# Altium PCB POWR0008.PcbDoc
Units mm, origin at the board's own origin, x right, y up, seen from the top; angles counter-clockwise.
Board outline 50 x 50 mm, 2 copper layers (Top Layer, Bottom Layer); 40 components, 31 nets, 143 pads, 71 vias.
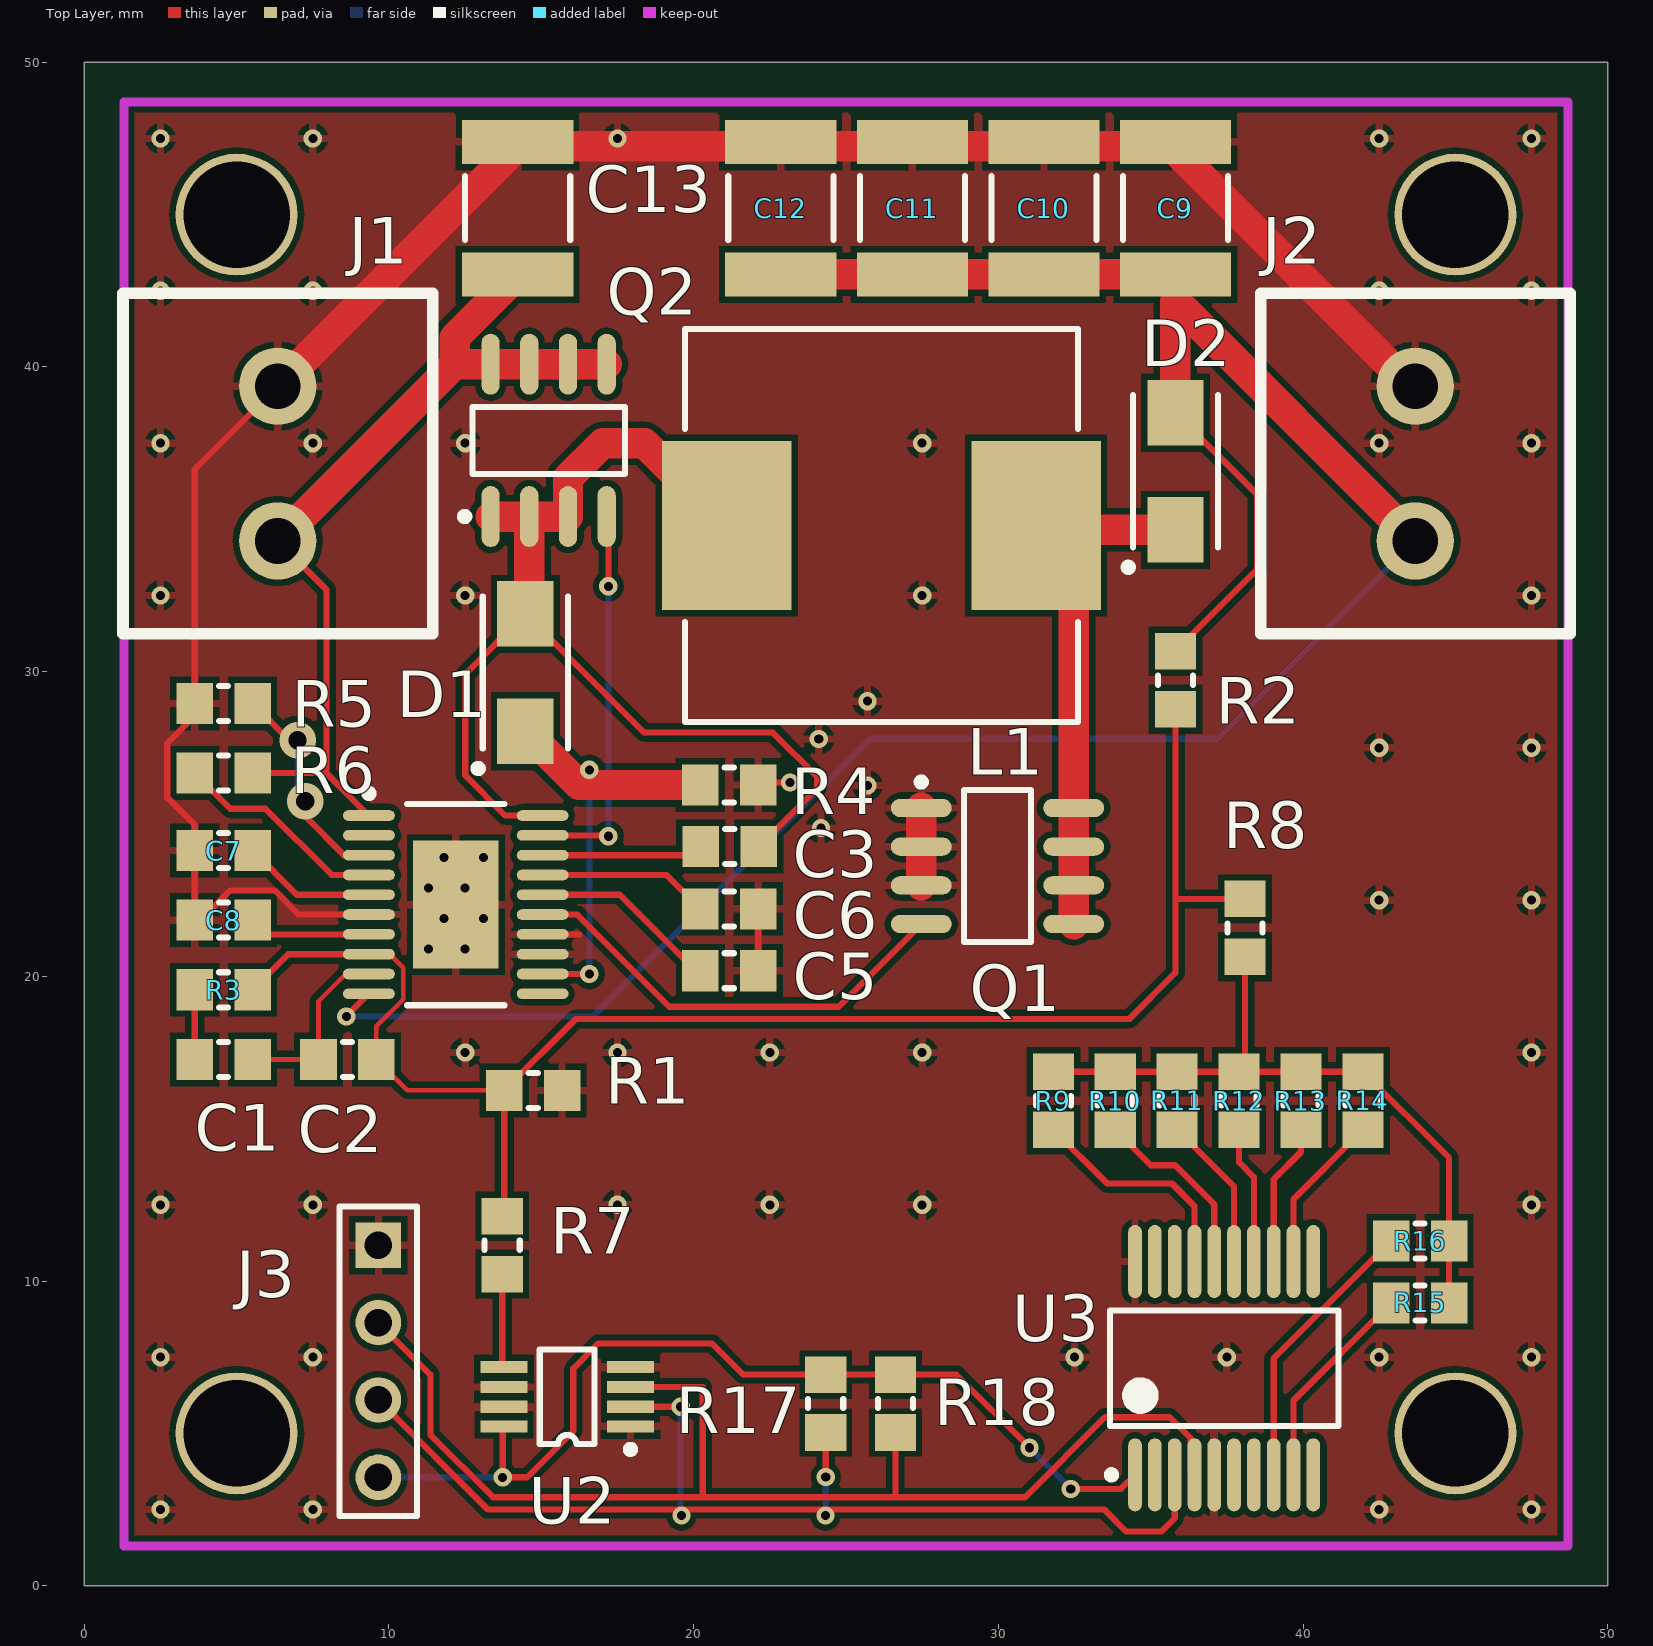
[diagram p0: Top Layer view]
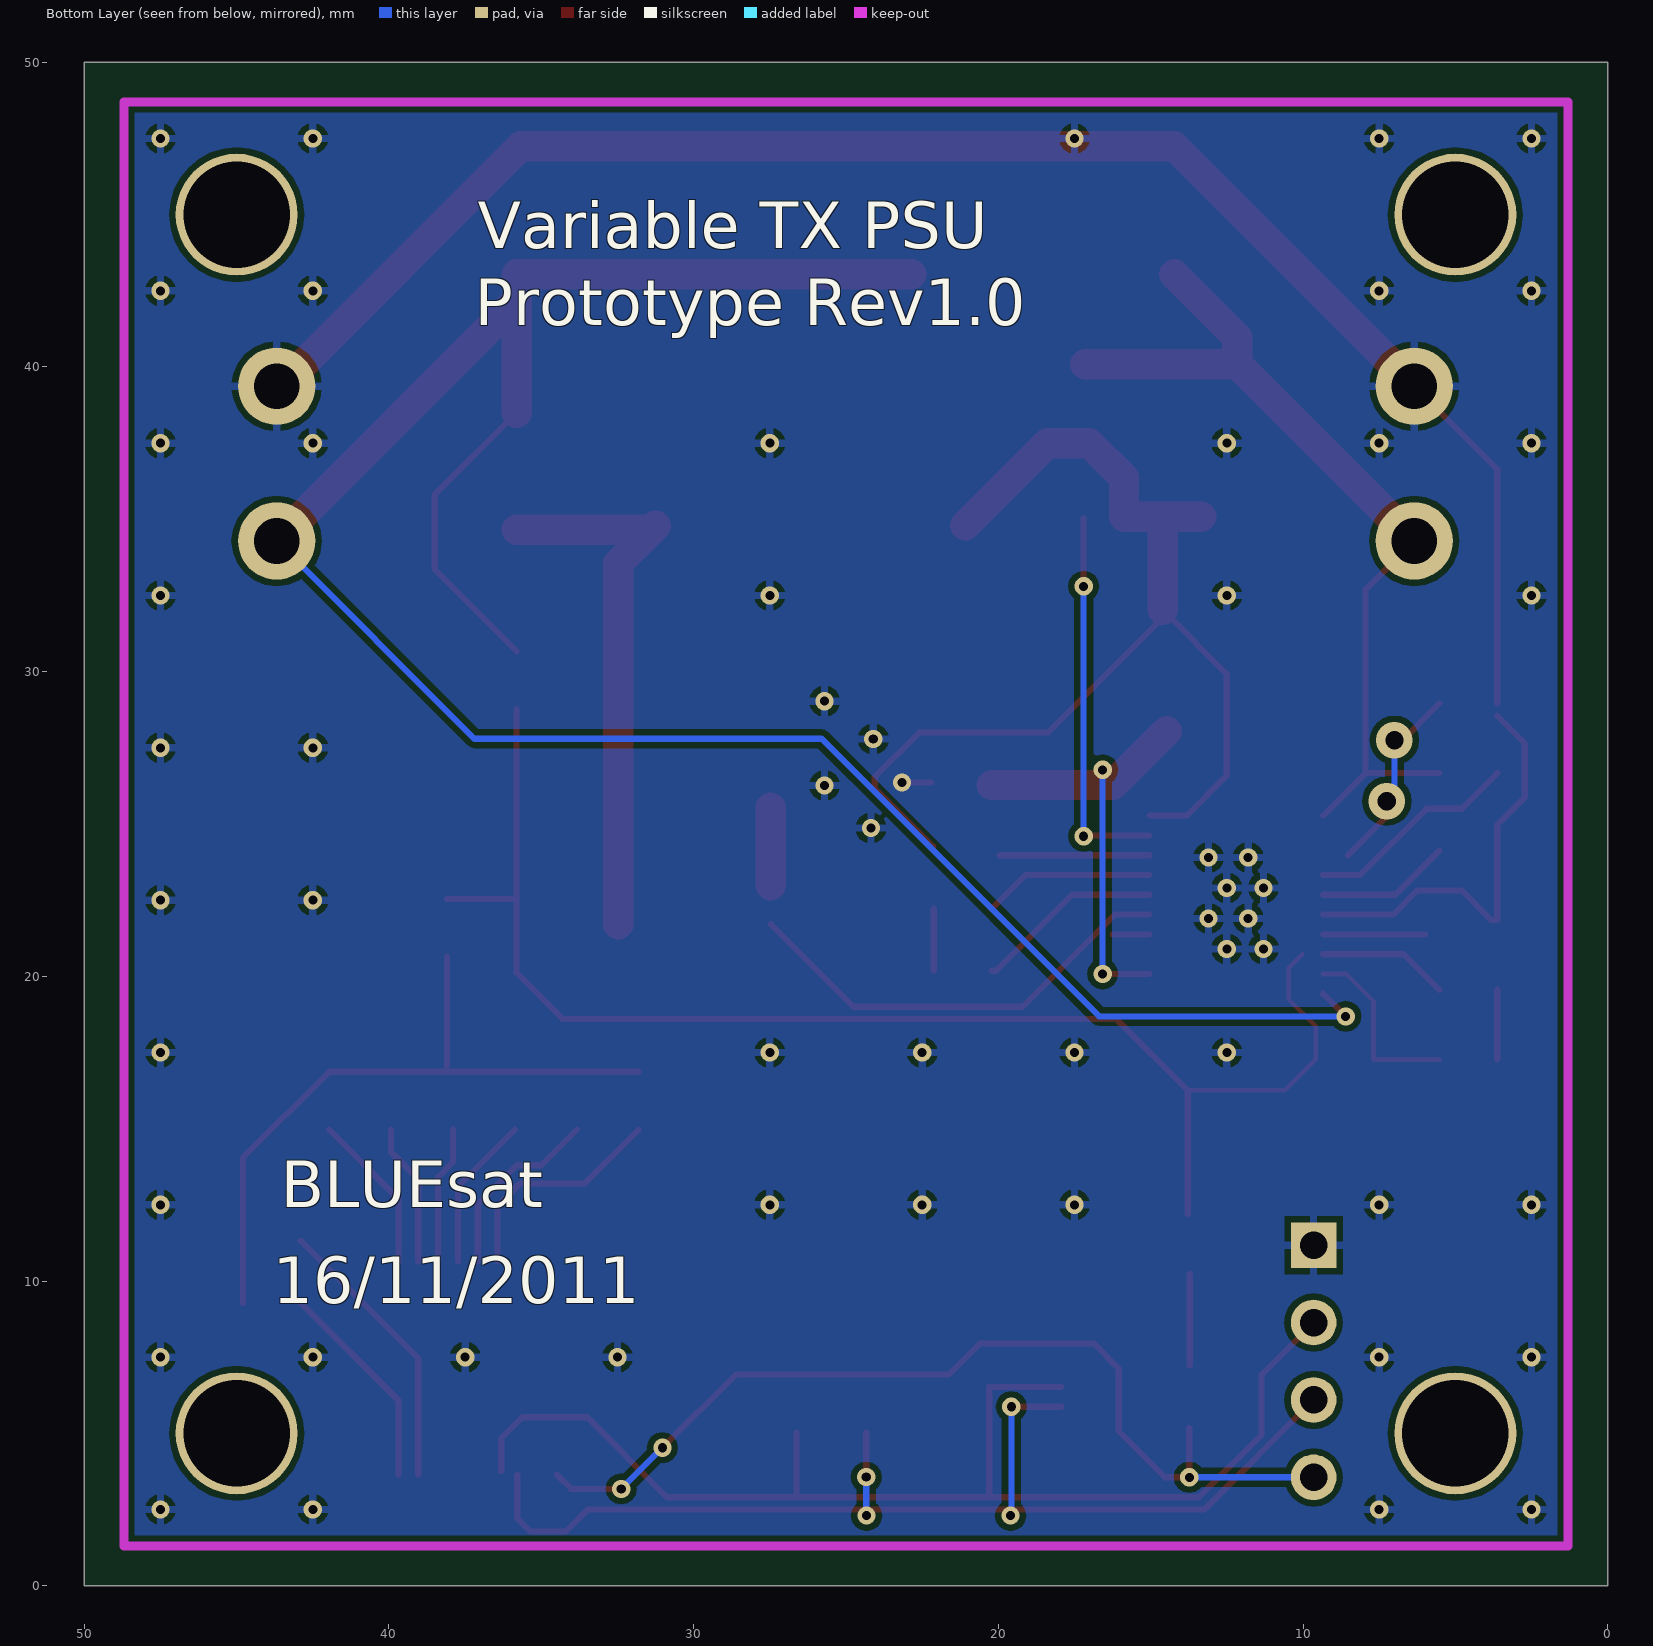
[diagram p1: Bottom Layer view, seen from below]

## Layer stack, top to bottom
Top Layer: signal copper 0.0356
Dielectric: dielectric 0.32, FR-4, Dk 4.8
Bottom Layer: signal copper 0.0356

## Board outline
0,0 50,0 50,50 0,50

## Design rules (kind name [scope] priority, off if disabled: settings)
Clearance [All] p1: gap=0.2
HoleSize [All] p1: absolutevalues=TRUE maxlimit=6.3 minlimit=0.025 maxpercent=80.000 minpercent=20.000
PolygonConnect [All] p1: connectstyle=Relief reliefconductorwidth=0.254 reliefentries=4 polygonreliefangle="90 Angle"
RoutingVias [All] p1: holewidth=0.3 width=0.6 viastyle="Through Hole" minholewidth=0.25 minwidth=0.5 maxholewidth=0.6 maxwidth=1.2
SilkscreenOverComponentPads [All] p1: minsilkscreentomaskgap=0.254
SolderMaskExpansion [All] p1: expansion=0.102
Width [All] p1: maxlimit=1 minlimit=0.152 preferedwidth=0.203
26 further rules are at their usual default settings.

## Components (designator, comment, footprint, x,y, rotation, side; value= is the part's Value field where it differs from the comment)
C1 "Czero" R0805M 4.572,17.272 r180 top
C2 "Cpole" R0805M 8.636,17.272 r0 top
C3 "Chb" R0805M 21.184,24.257 r0 top
C5 "Cvcc" R0805M 21.168,20.184 r180 top
C6 "Cvccx" R0805M 21.168,22.216 r180 top
C7 "Cramp" R0805M 4.572,24.13 r0 top
C8 "Css" R0805M 4.572,21.844 r0 top
C9 "C4532X7R1E226M" R1812M 35.814,45.212 r270 top
C10 "C4532X7R1E226M" R1812M 31.496,45.212 r270 top
C11 "C4532X7R1E226M" R1812M 27.178,45.212 r270 top
C12 "C4532X7R1E226M" R1812M 22.86,45.212 r270 top
C13 "C4532X7R1E226M" R1812M 14.224,45.212 r270 top
D1 "PMEG4050EP" SOD128M 14.478,29.972 r90 top
D2 "PMEG4050EP" SOD128M 35.814,36.576 r90 top
J1 "200MIL TERMINAL" "200MIL TERMINAL" 6.35,36.83 r90 top
J2 "200MIL TERMINAL" "200MIL TERMINAL" 43.688,36.83 r90 top
J3 "Header 4" HDR1X4 9.652,11.176 r270 top
L1 "SRR1260-220M" SRR1260M 26.162,34.798 r0 top
Q1 "SI4410DY" SO-8_N 29.972,23.622 r0 top
Q2 "SI4410DY" SO-8_N 15.24,37.592 r90 top
R1 "Rfb1" R0805M 14.732,16.256 r180 top
R2 "Rfb2" R0805M 35.814,29.718 r90 top
R3 "Rcomp" R0805M 4.572,19.558 r0 top
R4 "RS" R0805M 21.168,26.28 r180 top
R5 "RT" R0805M 4.572,28.956 r0 top
R6 "Ren" R0805M 4.572,26.67 r0 top
R7 "SP" R0805M 13.716,11.176 r90 top
R8 "SP" R0805M 38.1,21.59 r90 top
R9 "Rfb1" R0805M 31.806,15.916 r270 top
R10 "Rfb1" R0805M 33.838,15.916 r270 top
R11 "Rfb1" R0805M 35.87,15.916 r270 top
R12 "Rfb1" R0805M 37.902,15.916 r270 top
R13 "Rfb1" R0805M 39.934,15.916 r270 top
R14 "Rfb1" R0805M 41.966,15.916 r270 top
R15 "Rfb1" R0805M 43.844,9.284 r0 top
R16 "Rfb1" R0805M 43.844,11.316 r0 top
R17 "" R0805M 24.334,5.977 r90 top
R18 "" R0805M 26.62,5.977 r90 top
U2 "MCP4542" MSOP8 15.85,6.198 r90 top
U3 "MCP23009SS" SSOP20_M 37.413,7.138 r90 top

## Footprints (in the part's own frame and the unit in brackets; to place one, negate y for a bottom-side part, rotate by r counter-clockwise, add the part's x,y. Pads: shape width x height; smd on the part's side, far side on the other; paste and mask are expansions set on the pad)
"200MIL TERMINAL" [mm]
  round 2.54 hole 1.5: 0(-2.54,0) 1(2.54,0)
  silkscreen extent -5.59,-5.08 5.59,5.08
HDR1X4 [mm] "Connector; Header; 4 Position"
  rect 1.5x1.5 hole 0.9: 1(0,0)
  round 1.5 hole 0.9: 2(2.54,0) 3(5.08,0) 4(7.62,0)
  silkscreen extent -1.27,-1.27 8.89,1.27
MSOP8 [mm] "Shrink Small Outline; 8 Leads; Body Width 3 mm; Pitch 0.65 mm"
  rect 0.4x1.55 smd: 1(-0.975,-2.075) 2(-0.325,-2.075) 3(0.325,-2.075) 4(0.975,-2.075) 5(0.975,2.075) 6(0.325,2.075) 7(-0.325,2.075) 8(-0.975,2.075)
  silkscreen extent -1.85,-2.2 1.55,0.9
R0805M [mm] "Chip Resistor, 2-Leads, Body 2.0x1.3mm, IPC Medium Density"
  rect 1.2x1.35 smd: 1(-0.95,0) 2(0.95,0)
  silkscreen extent -0.15,-0.58 0.15,0.58, body extent -1.1,-0.67 1.1,0.67, height 0.6
R1812M [mm]
  rect 1.45x3.65 smd: 1(-2.175,0) 2(2.175,0)
  silkscreen extent -1.05,-1.73 1.05,1.73, body extent -2.45,-1.8 2.45,1.8, height 2
SO-8_N [mm] "SOIC, 8-Leads, Body 4.9x3.9mm, Pitch 1.27mm, IPC Medium Density"
  oval 2x0.6 smd: 1(-2.5,1.905) 2(-2.5,0.635) 3(-2.5,-0.635) 4(-2.5,-1.905) 5(2.5,-1.905) 6(2.5,-0.635) 7(2.5,0.635) 8(2.5,1.905)
  silkscreen extent -2.62,-2.5 1.1,2.88, body extent -2,-2.5 2,2.5, height 1.75
SOD128M [mm] "Molded Diode, 2-Leads, Body 4.7x2.5mm, IPC Medium Density"
  rect 2.15x1.85 smd: 1(-1.925,0) 2(1.925,0)
  silkscreen extent -3.27,-1.4 2.5,1.67, body extent -2.5,-1.35 2.5,1.35, height 1
SRR1260M [mm]
  rect 4.25x5.55 smd: 1(-5.075,0) 2(5.075,0)
  silkscreen extent -6.45,-6.45 6.45,6.45, body extent -6.4,-6.4 6.4,6.4, height 6
SSOP20_M [mm] "SOP, 20-Leads, Body 7.2x5.3mm, Pitch 0.65mm, IPC Low Density"
  oval 2.4x0.45 smd: 1(-3.5,2.925) 2(-3.5,2.275) 3(-3.5,1.625) 4(-3.5,0.975) 5(-3.5,0.325) 6(-3.5,-0.325) 7(-3.5,-0.975) 8(-3.5,-1.625) 9(-3.5,-2.275) 10(-3.5,-2.925) 11(3.5,-2.925) 12(3.5,-2.275) 13(3.5,-1.625) 14(3.5,-0.975) 15(3.5,-0.325) 16(3.5,0.325) 17(3.5,0.975) 18(3.5,1.625) 19(3.5,2.275) 20(3.5,2.925)
  silkscreen extent -3.62,-3.75 1.9,3.82, body extent -2.7,-3.75 2.7,3.75, height 1.99

## Part data
C1 C2 C3 C5 C6 C7 C8 C9 C10 C11 C12 C13: library part Cap, "Capacitor"
D1 D2: library part Diode, "Default Diode"
J3: "Header, 4-Pin"
L1: library part Inductor, "Inductor"
Q1 Q2: "N-Channel 30V (D-S)  MOSFET"
R1 R2 R3 R4 R5 R6 R7 R8 R9 R10 R11 R12 R13 R14 R15 R16 R17 R18: library part Res2, "Resistor"

## Free pads (board coordinates)
  round 4 hole 3.5: 1(5,45) 2(45,45) 3(5,5) 4(45,5)
  oval 1.7x0.35 smd: 1(9.342,25.277) 2(9.342,24.627) 3(9.342,23.977) 4(9.342,23.327) 5(9.342,22.677) 6(9.342,22.027) 7(9.342,21.377) 8(9.342,20.727) 9(9.342,20.077) 10(9.342,19.427) 11(15.042,19.427) 12(15.042,20.077) 13(15.042,20.727) 14(15.042,21.377) 15(15.042,22.027) 16(15.042,22.677) 17(15.042,23.327) 18(15.042,23.977) 19(15.042,24.627) 20(15.042,25.277)
  rect 2.8x4.2 smd: 21(12.192,22.352)

## Via types
v1: diameter 0.6, hole 0.3, Top Layer to Bottom Layer, 69 vias
v2: diameter 1.2, hole 0.6, Top Layer to Bottom Layer, 2 vias

## Nets (pads, with @x,y where several pads share a name; then routed paths per layer and width w, separated by ;. In a path a pad name is that pad's centre, name@x,y a point inside that pad or via, vN(x,y) a via of type N, cw(c..) or ccw(c..) an arc to the next point about the centre after c; other vN are vias at no path point)
GND: C5.1 C6.1 C7.1 C8.1 C9.1 C10.1 C11.1 C12.1 C13.1 J1.1 J2.1 J3.1 pad.6 pad.13 pad.14 pad.21 Q1.1 Q1.2 Q1.3 R1.1 R4.1 R5.1 U2.1 U2.4 U2.6 U2.7 U3.5 U3.20 | length 75.9
  Top Layer w0.203: R5.1@3.622,28.548 2.72,27.647 2.72,25.87 3.622,24.968 C7.1 C8.1 3.82,21.844 4.797,22.821 6.247,22.821 7.041,22.027 pad.6 ; R5.1 3.622,36.642 J1.1 ; pad.14 16.256,21.377 ; C5.1 C6.1 ; R4.1@22.203,26.365 v1(23.165,26.365)
  Top Layer w1: J1.1 14.224,47.244 35.671,47.244 J2.1@43.545,39.37 ; Q1.3 Q1.2 Q1.1
  other v1: 2.5,2.5 7.5,2.5 42.5,2.5 47.5,2.5 2.5,7.5 7.5,7.5 32.5,7.5 37.5,7.5 42.5,7.5 47.5,7.5 2.5,12.5 7.5,12.5 17.5,12.5 22.5,12.5 27.5,12.5 47.5,12.5 12.5,17.5 17.5,17.5 22.5,17.5 27.5,17.5 47.5,17.5 11.3,20.9 12.5,20.9 11.8,21.9 13.1,21.9 42.5,22.5 47.5,22.5 11.3,22.9 12.5,22.9 11.8,23.9 13.1,23.9 24.181,24.867 25.705,26.264 42.5,27.5 47.5,27.5 24.105,27.788 25.705,29.032 2.5,32.5 12.5,32.5 27.5,32.5 47.5,32.5 2.5,37.5 7.5,37.5 12.5,37.5 27.5,37.5 42.5,37.5 47.5,37.5 2.5,42.5 7.5,42.5 42.5,42.5 47.5,42.5 2.5,47.5 7.5,47.5 17.5,47.5 42.5,47.5 47.5,47.5
NetC1_1: C1.1 C2.1 pad.9 | length 6.1
  Top Layer w0.152: C1.1 C2.1 7.686,19.186 8.577,20.077 pad.9
NetC1_2: C1.2 R3.1 | length 2.3
  Top Layer w0.203: C1.2 R3.1
NetC2_2: C2.2 pad.8 R1.2 R2.1 R3.2 R7.2 R8.2 | length 51.5
  Top Layer w0.152: pad.8@10.023,20.727 10.468,20.282 10.468,19.24 9.586,18.358 C2.2 10.602,16.256 R1.2
  Top Layer w0.203: R3.2 6.691,20.727 pad.8 ; R7.2@13.782,12.192 R1.2 16.126,18.6 34.3,18.6 35.814,20.114 R2.1 ; 35.874,22.54 R8.2
NetC3_1: C3.1 pad.18 | length 4.9
  Top Layer w0.203: pad.18 C3.1@19.954,23.977
NetC3_2: C3.2 D1.2 L1.1 pad.20 Q2.1 Q2.2 Q2.3 | length 37.9
  Top Layer w0.203: D1.2@14.605,32.024 D1.2 ; pad.20 13.823,25.277 12.5,26.6 12.5,29.919 D1.2 ; C3.2 24.054,26.177 24.054,26.546 22.6,28 18.375,28 D1.2
  Top Layer w1: Q2.1 Q2.2 ; D1.2@14.605,32.024 Q2.2 ; L1.1 18.385,37.5 17.013,37.5 15.875,36.362 Q2.3 Q2.2
NetC5_2: C5.2 pad.16 | length 6.2
  Top Layer w0.203: pad.16 17.573,22.677 20.066,20.184 C5.2
NetC6_2: C6.2 pad.17 | length 5.6
  Top Layer w0.203: pad.17 19.107,23.327 C6.2
NetC7_2: C7.2 pad.5 | length 4.4
  Top Layer w0.203: C7.2 6.975,22.677 pad.5
NetC8_2: C8.2 pad.7 | length 3.4
  Top Layer w0.203: C8.2@5.989,21.377 pad.7
NetD1_1: D1.1 pad.12 R4.2 | length 14.7
  Top Layer w0.203: pad.12 v1(16.577,20.077)
  Top Layer w1: D1.1 16.245,26.28 R4.2
  Bottom Layer w0.203: v1(16.577,20.077) v1(16.577,26.777)
NetD2_1: D2.1 L1.2 Q1.5 Q1.6 Q1.7 Q1.8 | length 18
  Top Layer w1: L1.2 L1.2@31.384,34.651 ; Q1.5 Q1.6 Q1.7 Q1.8 32.472,33.563 L1.2@31.384,34.651 ; D2.1 L1.2@31.384,34.651
NetQ1_4: pad.15 Q1.4 | length 14.8
  Top Layer w0.203: pad.15 16.176,22.027 19.2,19.003 24.758,19.003 Q1.4
NetQ2_4: pad.19 Q2.4 | length 12.6
  Top Layer w0.203: pad.19 17.173,24.627 v1(17.2,24.6) ; v1(17.2,32.8) Q2.4@17.2,35.037
  Bottom Layer w0.203: v1(17.2,24.6) v1(17.2,32.8)
NetR5_2: pad.3@9.342,23.977 R5.2 | length 6.4
  Top Layer w0.152: v2@6.728,27.75 v2(7,27.75) ; v2@7.25,25.25 v2(7.25,25.75)
  Top Layer w0.203: R5.2 v2@6.728,27.75 ; v2@7.25,25.25 pad.3@8.523,23.977
  Bottom Layer w0.152: v2@7,26 v2(7.25,25.75)
  Bottom Layer w0.203: v2@7,26 v2(7,27.75)
NetR6_1: pad.4@9.342,23.327 R6.1 | length 7.1
  Top Layer w0.203: R6.1 4.792,25.5 5.943,25.5 8.116,23.327 pad.4@9.342,23.327
NetR7_1: R7.1 U2.5 | length 3
  Top Layer w0.203: U2.5@13.716,7.231 R7.1
NetR8_1: R8.1 R9.1 R10.1 R11.1 R12.1 R13.1 R14.1 R15.2 R16.2 | length 22.5
  Top Layer w0.203: R9.1 R10.1 R11.1 R12.1 R13.1 R14.1 44.794,14.038 R16.2 R15.2 ; R12.1@38.1,17.064 R8.1
NetR9_2: R9.2 U3.17 | length 7.5
  Top Layer w0.203: R9.2 33.572,13.2 35.7,13.2 36.438,12.462 U3.17
NetR10_2: R10.2 U3.16 | length 6.1
  Top Layer w0.203: R10.2 35.004,13.8 35.8,13.8 37.088,12.512 U3.16
NetR11_2: R11.2 U3.15 | length 5.1
  Top Layer w0.203: R11.2 37.738,13.098 U3.15
NetR12_2: R12.2 U3.14 | length 4.5
  Top Layer w0.203: R12.2 37.902,13.898 38.388,13.412 U3.14
NetR13_2: R13.2 U3.13 | length 4.7
  Top Layer w0.203: U3.13 39.038,13.338 39.934,14.234 R13.2
NetR14_2: R14.2 U3.12 | length 5.3
  Top Layer w0.203: U3.12 39.688,12.688 R14.2
NetR15_1: R15.1 U3.9 | length 7
  Top Layer w0.203: U3.9 39.688,6.078 R15.1
NetR16_1: R16.1 U3.8 | length 9.3
  Top Layer w0.203: U3.8 39.038,7.46 R16.1
SCL: J3.3 R17.1 U2.2 U3.3 | length 37.5
  Top Layer w0.203: J3.3 13.248,2.5 33.475,2.5 34.2,1.775 35.35,1.775 35.788,2.213 U3.3 ; U2.2 v1(19.573,5.873) ; v1@24.325,2.275 24.301,2.275 v1(24.326,2.3) ; v1(24.334,3.566) R17.1
  Bottom Layer w0.203: v1@19.573,2.327 v1(19.573,5.873) ; v1(24.326,2.3) 24.334,2.308 v1(24.334,3.566)
  other v1: 19.6,2.3
SDA: J3.2 R18.1 U2.3 U3.4 | length 40.7
  Top Layer w0.203: J3.2 11.359,6.929 11.359,4.959 13.415,2.903 30.878,2.903 33.5,5.525 35.621,5.525 36.315,4.831 U3.4@36.315,3.761 ; U2.3 20.3,6.523 20.3,2.926 ; 26.62,2.924 R18.1
VDD: J3.4 R17.2 R18.2 U2.8 U3.1 | length 31.6
  Top Layer w0.203: U2.8@13.731,5.179 v1(13.731,3.556) 14.531,3.556 16.05,5.075 16.05,7.125 16.875,7.95 20.6,7.95 21.623,6.927 R17.2 R18.2 28.623,6.927 v1(31.025,4.525) ; v1(32.375,3.175) 34.025,3.175 U3.1
  Bottom Layer w0.203: J3.4 v1(13.731,3.556) ; v1(31.025,4.525) v1(32.375,3.175)
VIN: C13.2 J1.0 pad.1@9.342,25.277 Q2.5 Q2.6 Q2.7 Q2.8 R6.2 | length 29.7
  Top Layer w0.203: R6.2 7.949,26.67 ; J1.0 7.949,32.691 7.949,26.67 ; pad.1@9.342,25.277 7.949,26.67
  Top Layer w1: J1.0 12.152,40.092 ; C13.2 12.152,40.965 12.152,40.092 ; Q2.5 Q2.6 Q2.7 Q2.8 12.152,40.092
VOUT: C9.2 C10.2 C11.2 C12.2 D2.2 J2.0 pad.10 R2.2 | length 80.4
  Top Layer w0.203: v1(8.6,18.685) pad.10 ; R2.2 38.5,33.354 38.5,35.815 D2.2
  Top Layer w1: C12.2 C11.2 C10.2 C9.2 ; D2.2 35.814,42.164 J2.0
  Bottom Layer w0.203: v1(8.6,18.685) 16.685,18.685 25.8,27.8 37.198,27.8 J2.0
pads on no net: U3.2 U3.6 U3.7 U3.10 U3.11 U3.18 U3.19

## Polygon pours and split planes (outlines as drawn)
GND on Bottom Layer "Top Layer-No Net" (solid, pour order 1000): 1.3,1.3 48.7,1.3 48.7,48.7 1.3,48.7
GND on Top Layer "Top Layer-No Net" (solid): 1.3,1.3 48.7,1.3 48.7,48.7 1.3,48.7

## Keep-outs
Keep-Out Layer:
  lines w0.3: 1.3,1.3 1.3,48.7 48.7,48.7 48.7,1.3 1.3,1.3

## Silkscreen, mask and mechanical layers (free items; w line width, h text height)
Top Overlay:
  circle w0.25: c9.342,26.002 r0.125
  lines w0.2: 10.592,19.052 13.792,19.052 ; 10.592,25.652 13.792,25.652
Bottom Overlay:
  text "Variable TX PSU" at 37.084,43.891 h1.52
  text "Prototype Rev1.0" at 37.186,41.377 h1.52
  text "BLUEsat" at 43.561,12.421 h1.52
  text "16/11/2011" at 43.815,9.271 h1.52
Mechanical 13:
  circle w0.1: c10.842,24.752 r0.5
  lines w0.1: 9.942,19.052 14.442,19.052 14.442,25.652 9.942,25.652 9.942,19.052
Mechanical 15:
  lines w0.1: 11.692,22.352 12.692,22.352 ; 12.192,21.852 12.192,22.852 ; 8.242,18.802 16.142,18.802 16.142,25.902 8.242,25.902 8.242,18.802